# EAGLE board 0805_0603_0402 (EAGLE 9.4.2)
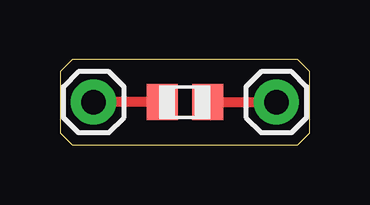
[diagram p0: board, top side]
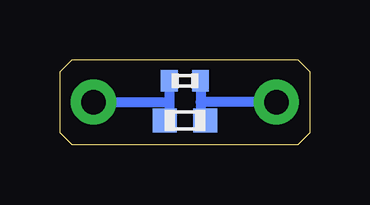
[diagram p1: board, bottom side, seen from below]

Size 10.41 x 3.55 mm. Coordinates in mm from the lower left corner, seen from the top.
Outline: 9.91,3.55 0.5,3.55 0,3.05 0,0.5 0.5,0 9.91,0 10.41,0.5 10.41,3.05 9.91,3.55
Copper layers (1*16): Top 0.035559375mm / dielectric 1.6mm / Bottom 0.035559375mm
Design rules "oshpark-2layer": minimum track width 6mil, minimum drill 10mil, track to track 6mil, track to pad 6mil, pad to pad 6mil, via to via 6mil, smd to smd 6mil, copper to edge 15mil, drill to drill 6mil, minimum pad ring 5mil, minimum via ring 5mil, stop-mask expansion 2.5mil, vias tented up to drill 0mil, thermal gap 10mil

## Footprints (pad centres in the part's own frame; a part is rotated, then mirrored left to right if it is on the bottom)
1X01 = drill 1.016 pad 1.88: 1 0,0
R0805 = smd 1.3 x 1.5: 1 -0.95,0; 2 0.95,0
R0603 = smd 1 x 1: 1 -0.85,0; 2 0.85,0
R0402 = smd 0.7 x 0.9: 1 -0.65,0; 2 0.65,0

## Placement (x,y rotation side)
J1  [1X01]  1.4,1.78 0 top
J2  [1X01]  9.02,1.78 0 top
R1  [R0805]  5.21,1.78 0 top
R2  [R0603]  5.21,1.02 180 bottom
R3  [R0402]  5.21,2.67 180 bottom

## Library data of the parts
J1 J2 = bschulz
R1 = bschulz_passives
R2 R3 = bschulz_passives; MF: Yageo

## Nets
N$1: J1.1 R1.1 R2.1 R3.1
N$2: J2.1 R1.2 R2.2 R3.2

## Tracks (layer width: path | path; a pad name or v marks a point on that pad's centre or on a via)
N$1
  Top 0.406: R1.1 J1.1
  Bottom 0.305: 4.56,1.22 R2.1
  Bottom 0.406: R3.1 4.56,1.78 | 4.56,1.78 4.56,1.22 | J1.1 4.56,1.78
N$2
  Top 0.406: R1.2 J2.1
  Bottom 0.305: 5.86,1.22 R2.2
  Bottom 0.406: R3.2 5.86,1.78 | 5.86,1.78 5.86,1.22 | J2.1 5.86,1.78

## Text on the board
tDocu: 0805
bDocu: 0402 | 0603